# EAGLE board LED MATRIX PTH (EAGLE 9.2.2)
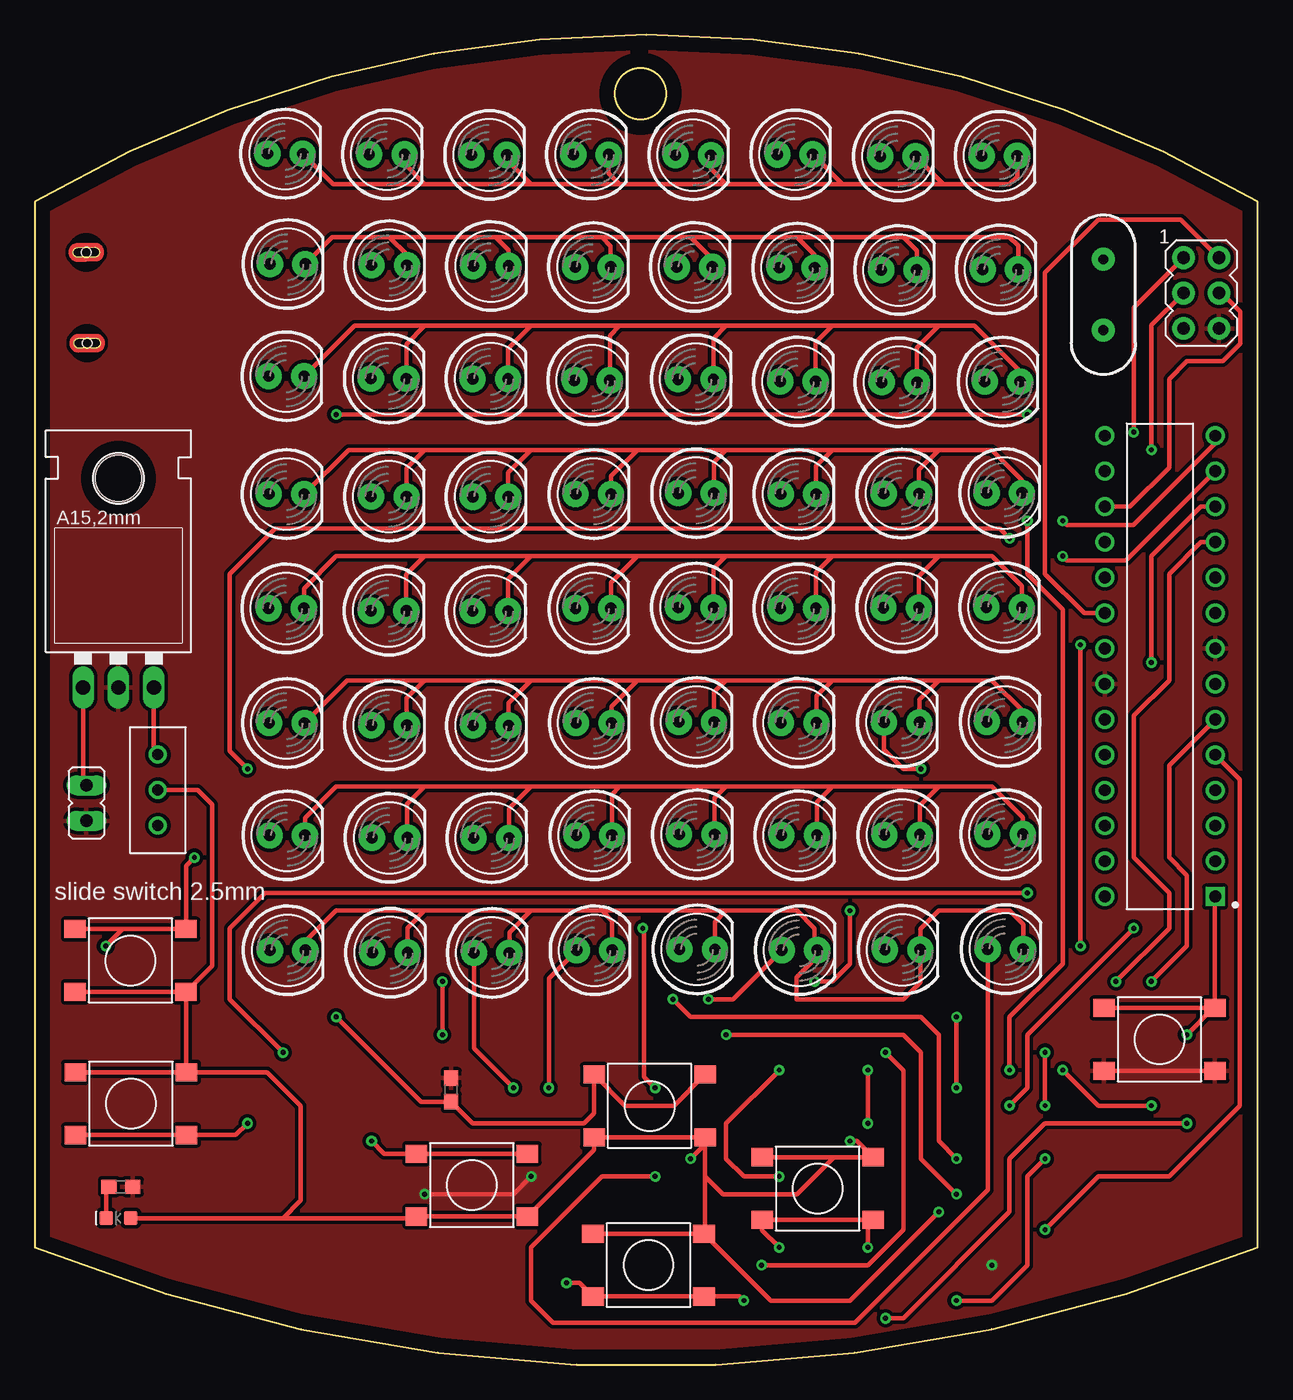
[diagram p0: board, top side]
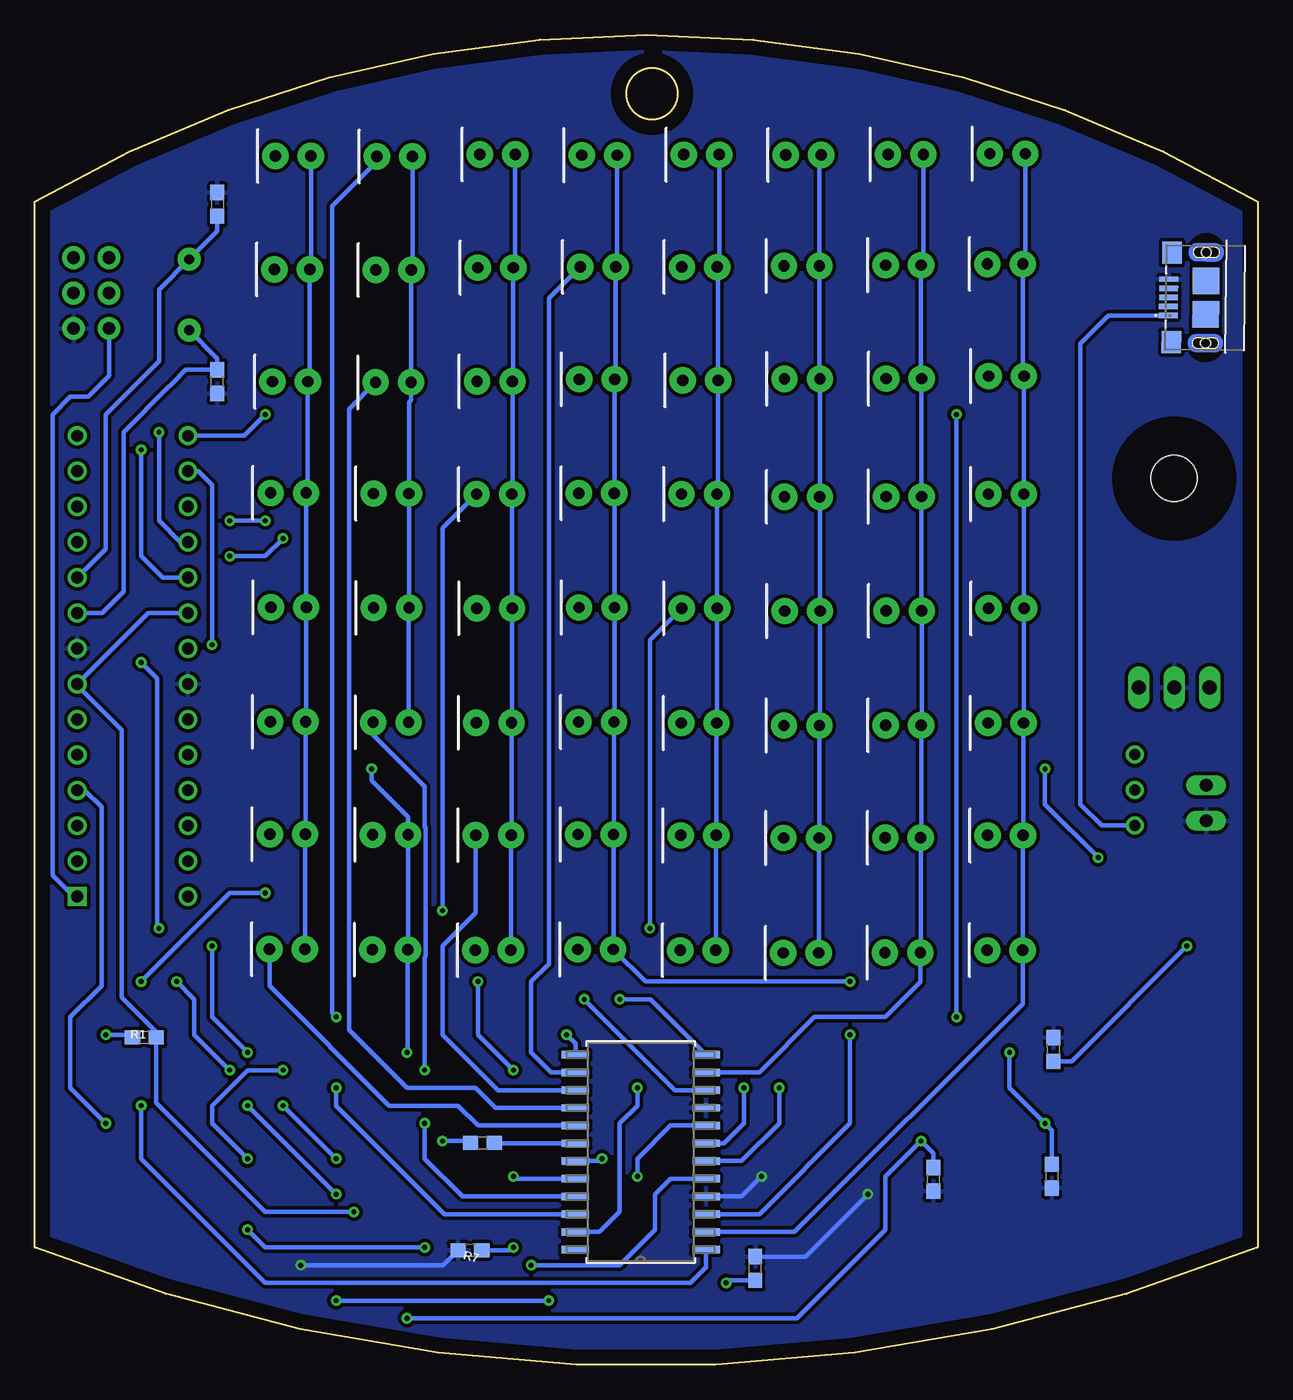
[diagram p1: board, bottom side, seen from below]

Size 87.63 x 95.29 mm. Coordinates in mm from the lower left corner, seen from the top.
Outline: 0,83.33 0,8.4 arc44 87.63,8.4 87.63,83.33 arc61 0,83.33
Outline: circle at 43.4,91.07 radius 1.83
Copper layers (1*16): Top 0.035mm / dielectric 1.5mm / Bottom 0.035mm
Design rules "default": minimum track width 6mil, minimum drill 0.35mm, track to track 6mil, track to pad 6mil, pad to pad 6mil, via to via 6mil, smd to smd 6mil, copper to edge 40mil, drill to drill 6mil, minimum pad ring 10mil, minimum via ring 8mil, stop-mask expansion 4mil, vias tented up to drill 0mil, thermal gap 10mil

## Footprints (pad centres in the part's own frame; a part is rotated, then mirrored left to right if it is on the bottom)
0603 = smd 1.1 x 1: 1 -0.85,0; 2 0.85,0
LED-0603 = smd 1 x 1: A -0.877,0; C 0.877,0
LED_5MM = drill 0.813 pad 1.88: A -1.27,0; K 1.27,0
AVRISP = drill 0.9 pad 1.626: 1 -1.27,2.54; 2 1.27,2.54; 3 -1.27,0; 4 1.27,0; 5 -1.27,-2.54; 6 1.27,-2.54
TE_2013499-1 = smd 0.4 x 1.35: 1 -1.3,0; 2 -0.65,0; 3 0,0; 4 0.65,0; 5 1.3,0 | smd 1.6 x 1.4: 6 3.2,-0.225; 7 -3.2,-0.225 | smd 1.9 x 1.9: 8 -1.2,-2.675; 9 1.2,-2.675 | smd 0.1 x 0.1: 10 -3.76,-2.37; 11 2.75,-2.53 | hole 0.71: -3.255,-2.675; 3.255,-2.675
JP1 = drill 0.914 long: 1 0,-1.27; 2 0,1.27
PTS645SM43SMTR = smd 1.55 x 1.3: 1 -3.975,2.25; 2 3.975,2.25; 3 -3.975,-2.25; 4 3.975,-2.25
78XXL = drill 1.016 long: GND 0,-3.81; IN -2.54,-3.81; OUT 2.54,-3.81 | hole 3.302: 0,11.176
DIP794W46P254L2967H457Q28B = drill 0.85 square: 1 -3.96,16.51 | drill 0.85: 2 -3.96,13.97; 3 -3.96,11.43; 4 -3.96,8.89; 5 -3.96,6.35; 6 -3.96,3.81; 7 -3.96,1.27; 8 -3.96,-1.27; 9 -3.96,-3.81; 10 -3.96,-6.35; 11 -3.96,-8.89; 12 -3.96,-11.43; 13 -3.96,-13.97; 14 -3.96,-16.51; 15 3.96,-16.51; 16 3.96,-13.97; 17 3.96,-11.43; 18 3.96,-8.89; 19 3.96,-6.35; 20 3.96,-3.81; 21 3.96,-1.27; 22 3.96,1.27; 23 3.96,3.81; 24 3.96,6.35; 25 3.96,8.89; 26 3.96,11.43; 27 3.96,13.97; 28 3.96,16.51
21-0042B_24 = smd 1.981 x 0.533: 1 -4.686,6.985; 2 -4.686,5.715; 3 -4.686,4.445; 4 -4.686,3.175; 5 -4.686,1.905; 6 -4.686,0.635; 7 -4.686,-0.635; 8 -4.686,-1.905; 9 -4.686,-3.175; 10 -4.686,-4.445; 11 -4.686,-5.715; 12 -4.686,-6.985; 13 4.686,-6.985; 14 4.686,-5.715; 15 4.686,-4.445; 16 4.686,-3.175; 17 4.686,-1.905; 18 4.686,-0.635; 19 4.686,0.635; 20 4.686,1.905; 21 4.686,3.175; 22 4.686,4.445; 23 4.686,5.715; 24 4.686,6.985
TS02_SWITCH = drill 0.8: PIN1 0,2.54; PIN2 0,0; PIN3 0,-2.54
HC49US = drill 0.7 pad 1.651: 1 -2.54,0; 2 2.54,0

## Placement (x,y rotation side)
C1  22pF  [0603]  74.55,70.44 90 bottom
C2  22pF  [0603]  74.55,83.14 270 bottom
D1  WHITE  [LED-0603]  5.99,10.5 180 top
D2  [LED_5MM]  17.92,86.77 0 top
D3  [LED_5MM]  25.22,86.72 0 top
D4  [LED_5MM]  32.55,86.68 0 top
D5  [LED_5MM]  39.85,86.71 0 top
D6  [LED_5MM]  47.17,86.67 0 top
D7  [LED_5MM]  54.48,86.72 0 top
D8  [LED_5MM]  61.85,86.58 0 top
D9  [LED_5MM]  69.12,86.62 0 top
D10  [LED_5MM]  18.11,78.87 0 top
D11  [LED_5MM]  25.39,78.78 0 top
D12  [LED_5MM]  32.68,78.73 0 top
D13  [LED_5MM]  40,78.65 0 top
D14  [LED_5MM]  47.28,78.66 0 top
D15  [LED_5MM]  54.62,78.61 0 top
D16  [LED_5MM]  61.92,78.44 0 top
D17  [LED_5MM]  69.2,78.48 0 top
D18  [LED_5MM]  18.02,70.83 0 top
D19  [LED_5MM]  25.35,70.66 0 top
D20  [LED_5MM]  32.64,70.64 0 top
D21  [LED_5MM]  39.93,70.53 0 top
D22  [LED_5MM]  47.36,70.61 0 top
D23  [LED_5MM]  54.68,70.45 0 top
D24  [LED_5MM]  61.94,70.4 0 top
D25  [LED_5MM]  69.34,70.44 0 top
D26  [LED_5MM]  18.03,62.38 0 top
D27  [LED_5MM]  25.36,62.21 0 top
D28  [LED_5MM]  32.65,62.19 0 top
D29  [LED_5MM]  40.02,62.38 0 top
D30  [LED_5MM]  47.38,62.45 0 top
D31  [LED_5MM]  54.71,62.39 0 top
D32  [LED_5MM]  62.09,62.42 0 top
D33  [LED_5MM]  69.47,62.46 0 top
D34  [LED_5MM]  18.01,54.19 0 top
D35  [LED_5MM]  25.34,54.02 0 top
D36  [LED_5MM]  32.64,54 0 top
D37  [LED_5MM]  40.01,54.19 0 top
D38  [LED_5MM]  47.36,54.26 0 top
D39  [LED_5MM]  54.7,54.2 0 top
D40  [LED_5MM]  62.08,54.23 0 top
D41  [LED_5MM]  69.45,54.27 0 top
D42  [LED_5MM]  18.05,45.98 0 top
D43  [LED_5MM]  25.38,45.81 0 top
D44  [LED_5MM]  32.68,45.8 0 top
D45  [LED_5MM]  40.05,45.98 0 top
D46  [LED_5MM]  47.4,46.05 0 top
D47  [LED_5MM]  54.74,45.99 0 top
D48  [LED_5MM]  62.12,46.02 0 top
D49  [LED_5MM]  69.49,46.07 0 top
D50  [LED_5MM]  18.09,37.93 0 top
D51  [LED_5MM]  25.42,37.75 0 top
D52  [LED_5MM]  32.71,37.74 0 top
D53  [LED_5MM]  40.08,37.93 0 top
D54  [LED_5MM]  47.44,37.99 0 top
D55  [LED_5MM]  54.77,37.93 0 top
D56  [LED_5MM]  62.15,37.96 0 top
D57  [LED_5MM]  69.53,38.01 0 top
D58  [LED_5MM]  18.11,29.69 0 top
D59  [LED_5MM]  25.44,29.52 0 top
D60  [LED_5MM]  32.73,29.5 0 top
D61  [LED_5MM]  40.11,29.69 0 top
D62  [LED_5MM]  47.46,29.76 0 top
D63  [LED_5MM]  54.8,29.7 0 top
D64  [LED_5MM]  62.18,29.73 0 top
D65  [LED_5MM]  69.55,29.77 0 top
ISP1  AVRISP-6  [AVRISP]  83.59,76.79 0 top
J2  2013499-1  [TE_2013499-1]  6.39,76.48 89.4 bottom
JP1  [JP1]  3.69,40.25 0 top
R1  10k  [0603]  79.78,23.45 0 bottom
R2  330  [0603]  6.16,12.75 180 top
R3  22K  [0603]  55.55,15.89 0 bottom
R4  10K  [0603]  29.84,19.68 90 top
R5  10K  [0603]  36.01,6.89 90 bottom
R6  10K  [0603]  23.25,13.28 270 bottom
R7  10K  [0603]  56.45,8.21 180 bottom
R8  10K  [0603]  14.76,13.5 270 bottom
R9  10K  [0603]  14.64,22.59 90 bottom
S1  PTS645SM43SMTR  [PTS645SM43SMTR]  44.05,18.54 0 top
S9  PTS645SM43SMTR  [PTS645SM43SMTR]  43.97,7.13 180 top
S10  PTS645SM43SMTR  [PTS645SM43SMTR]  31.32,12.86 0 top
S11  PTS645SM43SMTR  [PTS645SM43SMTR]  56.09,12.62 180 top
S12  PTS645SM43SMTR  [PTS645SM43SMTR]  6.89,18.7 180 top
S13  PTS645SM43SMTR  [PTS645SM43SMTR]  6.85,28.96 0 top
S14  PTS645SM43SMTR  [PTS645SM43SMTR]  80.59,23.3 180 top
U1  [78XXL]  5.99,52.33 0 top
U2  ATMEGA328P-PU  [DIP794W46P254L2967H457Q28B]  80.62,50.05 180 top
U3  MAX7219CWGT  [21-0042B_24]  44.21,15.22 180 bottom
U$1  TS02_SWITCH  [TS02_SWITCH]  8.81,41.17 180 top
Y1  16MHz  [HC49US]  76.57,76.66 270 top

## Library data of the parts
C1 C2 = SparkFun-Capacitors; PROD_ID: CAP-07876
D1 = SparkFun-LED; PROD_ID: DIO-09004
D2-D65 = SparkFun-LED
ISP1 = adafruit
J2 = 2013499-1; AVAILABILITY: Unavailable; CENTERLINE_PITCH: .65 mm[.025 in]; COMMENT: 2013499-1; DESCRIPTION: Micro USB REC type B DIP assy_Au_; MF: TE Connectivity; MP: 2013499-1; NUMBER_OF_POSITIONS: 5; PACKAGE: None; PRICE: None; PRODUCT_TYPE: Connector; TE_PURCHASE_URL: https://www.te.com/usa-en/product-2013499-1.html?te_bu=Cor&te_type=disp&te_campaign=seda_glo_cor-seda-global-disp-prtnr-fy19-seda-model-bom-cta_sma-317_1&elqCampaignId=32493
JP1 = jumper
R1 = SparkFun-Resistors; PROD_ID: RES-00824
R2-R9 = SparkFun-Resistors; PROD_ID: RES-07851
S1 S9-S14 = PTS645SM43SMTR; AVAILABILITY: Unavailable; DESCRIPTION: Switch Tact 6mm 100gf h=4.3mm; MF: C&K; MP: PTS645SM43SMTR; PACKAGE: None; PRICE: None
U1 = SparkFun-IC-Power
U2 = ATMEGA328P-PU; AVAILABILITY: Unavailable; DESCRIPTION: Embedded microcontroller ATMEGA328P-PU PDIP 28 Microchip Technology 8-Bit 20 MHz I/O number 23; MF: Microchip; MP: ATMEGA328P-PU; PACKAGE: PDIP-28 Microchip; PRICE: None
U3 = MAX7219CWGT; AVAILABILITY: Unavailable; DESCRIPTION: Ic Drvr Dsply Led 8dig 24soic - Max7219cwg+t; MF: Maxim Integrated; MP: MAX7219CWG+T; PACKAGE: SOIC-24 Maxim Integrated; PRICE: None
U$1 = 2.54mm slide switch
Y1 = SparkFun-Clocks; PROD_ID: XTAL-08181; SF_ID: COM-00536

## Nets
5V: D1.A ISP1.2 R1.2 R3.1 S1.3 S1.4 S9.3 S9.4 S10.3 S10.4 S11.3 S11.4 S12.3 S12.4 S13.3 S13.4 U2.7 U2.20 U3.19 U$1.PIN2
5V_BAT: U1.OUT U$1.PIN3
5V_USB: J2.1 U$1.PIN1
ABC: R8.1 S12.1 S12.2 U2.6
CLK: U2.16 U3.13
COLUMN1: D2.A D10.A D18.A D26.A D34.A D42.A D50.A D58.A U3.2
COLUMN2: D3.A D11.A D19.A D27.A D35.A D43.A D51.A D59.A U3.11
COLUMN3: D4.A D12.A D20.A D28.A D36.A D44.A D52.A D60.A U3.6
COLUMN4: D5.A D13.A D21.A D29.A D37.A D45.A D53.A D61.A U3.7
COLUMN5: D6.A D14.A D22.A D30.A D38.A D46.A D54.A D62.A U3.3
COLUMN6: D7.A D15.A D23.A D31.A D39.A D47.A D55.A D63.A U3.10
COLUMN7: D8.A D16.A D24.A D32.A D40.A D48.A D56.A D64.A U3.5
COLUMN8: D9.A D17.A D25.A D33.A D41.A D49.A D57.A D65.A U3.8
DEF: R9.1 S13.1 S13.2 U2.13
DIN: U2.11 U3.1
DOUT: U3.24
DOWN: R5.1 S9.1 S9.2 U2.14
GND: C1.1 C2.1 ISP1.6 J2.5 JP1.1 R2.1 R4.2 R5.2 R6.2 R7.2 R8.2 R9.2 S14.1 S14.2 U1.GND U2.8 U2.22 U3.4 U3.9
LEFT: R6.1 S10.1 S10.2 U2.4
LOAD: U2.12 U3.12
MISO: ISP1.1 U2.18
MOSI: ISP1.4 U2.17
N$1: C1.2 U2.9 Y1.2
N$2: C2.2 U2.10 Y1.1
N$3: D1.C R2.2
N$9: R3.2 U3.18
RESET: ISP1.5 R1.1 S14.3 S14.4 U2.1
RIGHT: R7.1 S11.1 S11.2 U2.5
ROW1: D2.K D3.K D4.K D5.K D6.K D7.K D8.K D9.K U3.22
ROW2: D10.K D11.K D12.K D13.K D14.K D15.K D16.K D17.K U3.14
ROW3: D18.K D19.K D20.K D21.K D22.K D23.K D24.K D25.K U3.16
ROW4: D26.K D27.K D28.K D29.K D30.K D31.K D32.K D33.K U3.20
ROW5: D34.K D35.K D36.K D37.K D38.K D39.K D40.K D41.K U3.23
ROW6: D42.K D43.K D44.K D45.K D46.K D47.K D48.K D49.K U3.21
ROW7: D50.K D51.K D52.K D53.K D54.K D55.K D56.K D57.K U3.15
ROW8: D58.K D59.K D60.K D61.K D62.K D63.K D64.K D65.K U3.17
SCK: ISP1.3 U2.19
UP: R4.1 S1.1 S1.2 U2.15
V_BAT: JP1.2 U1.IN

## Tracks (layer width: path | path; a pad name or v marks a point on that pad's centre or on a via)
5V  (via drill 0.35)
  Top 0.305: S12.3 S12.4 | S13.3 S13.4 | S9.3 S9.4 | S1.4 S1.3 40.08,15.4 S10.4 S10.3 27.23,10.5 17.78,10.5 | S12.3 10.83,20.98 S13.4 | U$1.PIN2 11.68,41.17 12.7,40.15 12.7,28.58 S13.4 | ISP1.2 82.12,82.06 76.2,82.06 72.39,78.25 72.39,56.66 75.19,53.86 U2.20 | 57.27,14.87 S11.3 58.91,16.02 v58.42,16.02 | 57.27,14.87 S11.4 | 48.03,13.48 S1.4 | 57.27,14.87 54.61,12.21 49.3,12.21 48.03,13.48 | D1.A 17.78,10.5 | v46.99,14.75 48.03,15.79 S1.4 | S9.3 48.03,9.46 48.03,13.48 | 17.78,10.5 19.05,11.77 19.05,18.56 16.66,20.95 S12.3 | S9.3 52.74,4.59 58.42,4.59 v64.77,10.94
  Bottom 0.305: U2.20 79.5,53.86 U2.7 84.58,48.66 81.41,45.48 81.41,26.33 78.93,23.85 R1.2 78.93,18.75 71.12,10.94 v64.77,10.94 | R3.1 56.53,16.02 v58.42,16.02 | U3.19 47.15,14.59 v46.99,14.75
5V_BAT
  Top 0.305: U1.OUT 8.53,43.99 U$1.PIN3
5V_USB
  Bottom 0.305: U$1.PIN1 11.18,38.63 12.7,40.15 12.7,73.17 10.69,75.18 J2.1
ABC  (via drill 0.35)
  Top 0.305: S12.2 S12.1 14.4,16.45 v15.24,17.29 | U2.6 81.28,42.94 81.28,36.34 82.55,35.07 82.55,29.99 v80.01,27.45 | v71.12,33.8 16.51,33.8 13.97,31.26 13.97,26.18 v17.78,22.37
  Bottom 0.305: R8.1 14.76,16.81 v15.24,17.29 17.78,19.83 v17.78,22.37 | v80.01,27.45 73.66,33.8 v71.12,33.8
CLK  (via drill 0.35)
  Top 0.305: v49.53,23.64 62.23,23.64 63.5,22.37 63.5,14.75 v66.04,12.21 | v72.39,18.56 v72.39,22.37 | v74.93,29.99 v74.93,51.58
  Bottom 0.305: U3.13 48.9,23.01 v49.53,23.64 | v66.04,12.21 v72.39,18.56 | v72.39,22.37 74.93,24.91 v74.93,29.99 | v74.93,51.58 74.93,63.01 75.94,64.02 U2.16
COLUMN1
  Bottom 0.305: U3.2 33.18,9.51 16.84,25.85 D58.A 16.82,29.72 D50.A 16.78,37.96 D42.A 16.74,46.02 D34.A 16.76,54.2 D26.A D18.A 16.84,70.92 D10.A 16.65,79.05 D2.A
COLUMN2
  Bottom 0.305: U3.11 35.72,20.94 31.75,24.91 26.67,24.91 24.17,27.41 D59.A 24.15,29.55 D51.A 24.12,37.79 D43.A 24.08,45.85 D35.A 24.09,54.03 D27.A D19.A 24.12,70.7 D11.A 23.95,78.95 D3.A
COLUMN3  (via drill 0.35)
  Top 0.305: v34.29,19.83 31.46,22.66 D60.A
  Bottom 0.305: U3.6 36.99,14.59 34.29,17.29 v34.29,19.83 | D4.A 31.41,86.56 D12.A 31.41,70.68 D20.A D28.A 31.38,54.02 D36.A 31.37,45.84 D44.A 31.41,37.77 D52.A 31.44,29.53 D60.A
COLUMN4  (via drill 0.35)
  Top 0.305: v36.83,19.83 36.83,27.69 D61.A
  Bottom 0.305: U3.7 38.26,15.86 36.83,17.29 v36.83,19.83 | D5.A 38.58,78.79 D13.A 38.66,78.59 D21.A 38.66,62.47 D29.A 38.75,54.2 D37.A 38.74,46.02 D45.A 38.78,37.96 D53.A 38.84,37.9 D61.A
COLUMN5  (via drill 0.35)
  Top 0.305: v29.21,27.45 v29.21,23.64
  Bottom 0.305: v29.21,27.45 43.88,27.45 D62.A 46.17,29.78 D54.A 46.13,38.03 D46.A 46.09,46.09 D38.A 46.11,54.27 D30.A 46.09,62.47 D22.A 46.01,70.69 D14.A 45.9,78.76 D6.A | v29.21,23.64 29.21,17.29 35.72,10.78 U3.3
COLUMN6  (via drill 0.35)
  Top 0.305: v48.26,26.18 50.01,26.18 D63.A
  Bottom 0.305: U3.10 41.75,19.67 v48.26,26.18 | D7.A 53.21,78.75 D15.A 53.35,70.51 D23.A 53.41,62.42 D31.A 53.44,54.21 D39.A 53.43,46.03 D47.A 53.47,37.97 D55.A 53.5,29.72 D63.A
COLUMN7  (via drill 0.35)
  Top 0.305: v60.96,22.37 62.23,21.1 62.23,9.67 59.69,7.13 v52.07,7.13 | v63.5,42.69 62.23,42.69 60.85,44.07 D48.A
  Bottom 0.305: U3.5 42.07,13.32 43.18,12.21 43.18,9.67 45.72,7.13 v52.07,7.13 | v60.96,22.37 60.91,22.42 D64.A 60.91,29.94 60.96,29.99 60.88,30.07 D56.A 60.88,39.23 63.5,41.85 v63.5,42.69 | D8.A 60.58,78.52 D16.A 60.67,78.42 D24.A 60.67,69.13 60.81,68.99 D32.A | D32.A | D48.A 60.85,54.19 D40.A D32.A
COLUMN8  (via drill 0.35)
  Top 0.305: D65.A 68.28,12.52 58.78,3.02 37.13,3.02 35.56,4.59 35.56,8.4 40.64,13.48 v44.45,13.48
  Bottom 0.305: v44.45,13.48 44.45,14.75 42.07,17.13 U3.8 | D9.A 67.85,78.55 D17.A 67.92,70.58 D25.A 68.07,62.59 D33.A 68.2,54.29 D41.A 68.18,46.11 D49.A 68.22,38.04 D57.A 68.26,29.8 D65.A
DEF  (via drill 0.35)
  Top 0.305: S13.1 6.3,31.21 | 6.3,31.21 S13.2 10.83,35.74 v11.43,36.34 | v5.08,29.99 6.3,31.21 | U2.13 78.19,57.63 73.97,57.63 v73.66,57.93 | v69.85,59.2 69.14,59.91 17.22,59.91 13.97,56.66 13.97,43.96 v15.24,42.69
  Bottom 0.305: R9.1 13.34,21.74 v5.08,29.99 | v73.66,57.93 71.12,57.93 v69.85,59.2 | v15.24,42.69 15.24,40.15 v11.43,36.34
DIN  (via drill 0.35)
  Top 0.305: v77.47,27.45 81.28,31.26 81.28,33.8 78.74,36.34 78.74,46.5 81.28,49.04 81.28,56.66 83.56,58.94 U2.11 | v80.01,18.56 76.2,18.56 v73.66,21.1
  Bottom 0.305: U3.1 39.53,6.97 40.64,5.86 71.12,5.86 80.01,14.75 v80.01,18.56 | v73.66,21.1 76.2,23.64 76.2,26.18 v77.47,27.45
DOWN  (via drill 0.35)
  Top 0.305: v38.1,5.86 39.02,5.86 S9.2 S9.1 50.51,4.88 v50.8,4.59 | U2.14 84.58,66.03 78.72,60.17 73.97,60.17 v73.66,60.47 | v71.12,60.47 71.12,56.66 73.66,54.12 73.66,28.72 69.85,24.91 v69.85,21.1 | v66.04,4.59 68.58,4.59 71.12,7.13 71.12,13.48 v72.39,14.75
  Bottom 0.305: v38.1,5.86 37.92,6.04 R5.1 | v50.8,4.59 v66.04,4.59 | v73.66,60.47 v71.12,60.47 | v72.39,14.75 74.93,17.29 74.93,18.56 72.39,21.1 v69.85,21.1
GND  (via drill 0.35)
  Top 0.305: S14.1 S14.2 | v27.94,12.21 34.29,12.21 v35.56,13.48
  Bottom 0.305: R5.2 32.41,7.74 v27.94,12.21 | v35.56,13.48 36.99,12.05 U3.4 | R7.2 58.38,7.13 v68.58,7.13
  pour Top (isolate 0.254): -3.81,96.03 78.74,96.03 96.52,78.25 96.52,7.13 87.63,-1.76 5.08,-1.76 -6.35,9.67 -6.35,93.49
  pour Bottom (isolate 0.254): -7.62,93.49 2.54,103.65 71.12,103.65 97.79,76.98 97.79,54.12 97.79,-8.11 91.44,-14.46 -3.81,-14.46 -11.43,-6.84 -11.43,89.68
LEFT  (via drill 0.35)
  Top 0.305: S10.2 S10.1 25.04,15.11 v24.13,16.02 | v60.96,3.32 62.23,3.32 69.85,10.94 69.85,14.75 72.39,17.29 v82.55,17.29
  Bottom 0.305: R6.1 23.25,15.14 v24.13,16.02 26.67,13.48 26.67,9.67 33.02,3.32 v60.96,3.32 | v82.55,17.29 85.09,19.83 85.09,24.91 82.86,27.15 82.86,39.97 84.04,41.16 U2.4
LOAD  (via drill 0.35)
  Top 0.305: v45.72,26.18 46.99,24.91 63.5,24.91 64.77,23.64 64.77,16.02 v66.04,14.75 | v69.85,18.56 71.12,19.83 71.12,23.64 v78.74,31.26 | U2.12 83.56,61.48 80.01,57.93 v80.01,50.31
  Bottom 0.305: U3.12 43.5,26.18 v45.72,26.18 | v66.04,14.75 v69.85,18.56 | v80.01,50.31 78.87,49.17 78.87,31.39 v78.74,31.26
MISO  (via drill 0.35)
  Top 0.305: ISP1.1 78.74,75.75 v78.74,66.82
  Bottom 0.305: U2.18 77.21,58.94 78.74,60.47 v78.74,66.82
MOSI
  Top 0.305: ISP1.4 85.06,76.79 86.39,75.46 86.39,73.17 85.11,71.9 82.55,71.9 81.28,70.63 81.28,64.28 78.48,61.48 U2.17
N$1
  Bottom 0.305: U2.9 82.81,53.86 81.28,55.39 81.28,66.82 78.11,70 77.84,70.26 76.81,71.29 C1.2 74.55,72.11 Y1.2
N$2
  Bottom 0.305: U2.10 82.55,58.43 82.55,68.09 78.74,71.9 78.74,77.03 Y1.1 74.55,81.22 C2.2
N$3
  Top 0.305: D1.C 5.11,12.54 R2.2
N$9
  Bottom 0.305: R3.2 54.67,15.86 U3.18
RESET  (via drill 0.35)
  Top 0.305: S14.3 S14.4 | S14.3 84.57,33.52 U2.1 | v82.55,23.64 84.46,25.55 S14.3
  Bottom 0.305: ISP1.5 82.32,70.86 83.82,69.36 85.09,69.36 86.36,68.09 86.36,35.07 84.83,33.54 U2.1 | R1.1 80.83,23.64 v82.55,23.64
RIGHT  (via drill 0.35)
  Top 0.305: v53.34,8.4 52.12,9.63 S11.2 59.75,10.37 60.06,10.05 S11.1 59.69,9.99 v59.69,8.4 | U2.5 86.36,41.92 86.36,18.56 81.28,13.48 76.2,13.48 v72.39,9.67
  Bottom 0.305: v53.34,8.4 53.53,8.21 R7.1 | v59.69,8.4 71.12,8.4 v72.39,9.67
ROW1  (via drill 0.35)
  Top 0.305: v66.04,19.83 v66.04,24.91 | D2.K 21.37,84.6 27.94,84.6 | 27.94,84.6 35.56,84.6 | 35.56,84.6 41.91,84.6 | 41.91,84.6 49.53,84.6 | 49.53,84.6 57.87,84.6 | 57.87,84.6 65.09,84.6 | 65.09,84.6 69.85,84.6 70.39,85.14 D9.K | D8.K 65.09,84.6 | D7.K 57.87,84.6 | D6.K 48.44,85.69 49.53,84.6 | D5.K 41.12,85.39 41.91,84.6 | D3.K 26.49,86.05 27.94,84.6 | D4.K 33.82,86.34 35.56,84.6
  Bottom 0.305: U3.22 58.26,10.78 66.04,18.56 v66.04,19.83 | v66.04,24.91 66.34,25.22 66.34,83.03 63.12,86.25 D8.K
ROW2
  Top 0.305: D10.K 21.3,80.79 25.4,80.79 | D17.K 70.47,80.18 69.85,80.79 62.23,80.79 | 25.4,80.79 33.02,80.79 | 33.02,80.79 40.64,80.79 | 40.64,80.79 46.99,80.79 | 46.99,80.79 54.61,80.79 | 54.61,80.79 62.23,80.79 | D16.K 63.19,79.83 62.23,80.79 | D15.K 55.89,79.51 54.61,80.79 | D14.K 48.55,79.23 46.99,80.79 | D13.K 41.27,80.17 40.64,80.79 | D12.K 33.95,79.86 33.02,80.79 | D11.K 26.66,79.53 25.4,80.79
  Bottom 0.305: U3.14 50.64,20.94 52.07,22.37 52.07,27.45 50.8,28.72 50.8,76.41 D14.K
ROW3
  Top 0.305: D18.K 22.9,74.44 27.94,74.44 | D25.K 70.61,71.14 67.31,74.44 64.77,74.44 | 27.94,74.44 35.56,74.44 | 35.56,74.44 41.91,74.44 | 41.91,74.44 49.53,74.44 | 49.53,74.44 57.15,74.44 | 57.15,74.44 64.77,74.44 | D24.K 63.21,72.88 64.77,74.44 | D23.K 55.95,73.24 57.15,74.44 | D22.K 48.63,73.54 49.53,74.44 | D19.K 26.62,73.12 27.94,74.44 | D20.K 33.91,72.79 35.56,74.44 | D21.K 41.2,73.74 41.91,74.44
  Bottom 0.305: U3.16 54.61,18.4 56.04,19.83 60.96,19.83 65.13,24 65.13,68.49 D24.K
ROW4  (via drill 0.35)
  Top 0.305: v55.88,27.45 57.15,27.45 58.42,28.72 v58.42,32.53 | D26.K 22.47,65.55 27.94,65.55 | D33.K 70.74,63.39 68.58,65.55 64.77,65.55 | 27.94,65.55 35.56,65.55 | 35.56,65.55 43.18,65.55 | 43.18,65.55 49.53,65.55 | 49.53,65.55 57.15,65.55 | 57.15,65.55 64.77,65.55 | D32.K 63.37,64.15 64.77,65.55 | D31.K 55.98,64.38 57.15,65.55 | D30.K 48.65,64.67 49.53,65.55 | D29.K 41.29,63.66 43.18,65.55 | D28.K 33.92,63.91 35.56,65.55 | D27.K 26.63,64.24 27.94,65.55 | v53.34,13.48 50.8,13.48 49.53,14.75 49.53,17.29 v53.34,21.1
  Bottom 0.305: U3.20 53.18,13.32 v53.34,13.48 | v53.34,21.1 55.88,23.64 v55.88,27.45 | v58.42,32.53 58.42,59.95 D31.K
ROW5  (via drill 0.35)
  Top 0.305: v44.45,19.83 43.66,20.62 43.66,31.06 43.56,31.16 v43.56,31.26 | D34.K 19.28,55.62 21.59,57.93 27.94,57.93 | 27.94,57.93 35.56,57.93 | 35.56,57.93 43.18,57.93 | 43.18,57.93 49.53,57.93 | 49.53,57.93 57.15,57.93 | 57.15,57.93 64.77,57.93 | 64.77,57.93 68.58,57.93 70.72,55.79 D41.K | D40.K 63.35,56.51 64.77,57.93 | D39.K 55.97,56.75 57.15,57.93 | D38.K 48.63,57.03 49.53,57.93 | D37.K 41.28,56.03 43.18,57.93 | D36.K 33.91,56.28 35.56,57.93 | D35.K 26.62,56.61 27.94,57.93
  Bottom 0.305: U3.23 47.15,9.51 45.72,10.94 45.72,17.29 44.45,18.56 v44.45,19.83 | v43.56,31.26 43.56,51.91 D37.K
ROW6  (via drill 0.35)
  Top 0.305: D42.K 22.38,49.04 27.94,49.04 | D49.K 70.76,46.86 68.58,49.04 64.77,49.04 | 27.94,49.04 35.56,49.04 | 35.56,49.04 43.18,49.04 | 43.18,49.04 49.53,49.04 | 49.53,49.04 57.15,49.04 | 57.15,49.04 64.77,49.04 | D48.K 63.39,47.66 64.77,49.04 | D47.K 56.01,47.9 57.15,49.04 | D46.K 48.67,48.18 49.53,49.04 | D43.K 26.66,47.76 27.94,49.04 | D44.K 33.95,47.43 35.56,49.04 | D45.K 41.32,47.18 43.18,49.04 | v59.69,17.29 v59.69,21.1
  Bottom 0.305: v59.69,21.1 59.69,29.19 59.64,29.24 59.64,38.48 59.69,38.53 59.69,41.42 63.5,45.23 63.5,45.91 D48.K | v59.69,17.29 59.69,14.75 56.99,12.05 U3.21
ROW7
  Top 0.305: D50.K 19.36,39.19 21.59,41.42 27.94,41.42 | 27.94,41.42 35.56,41.42 | 35.56,41.42 41.91,41.42 | 41.91,41.42 49.53,41.42 | 49.53,41.42 57.15,41.42 | 57.15,41.42 64.77,41.42 | 64.77,41.42 68.58,41.42 70.8,39.2 D57.K | D56.K 63.42,40.07 64.77,41.42 | D55.K 56.04,40.31 57.15,41.42 | D54.K 48.71,40.6 49.53,41.42 | D53.K 41.35,40.86 41.91,41.42 | D52.K 33.98,39.84 35.56,41.42 | D51.K 26.69,40.17 27.94,41.42
  Bottom 0.305: U3.15 54.45,19.67 58.42,23.64 58.42,29.99 56.04,32.37 D55.K
ROW8
  Top 0.305: D58.K 19.38,30.32 21.59,32.53 27.94,32.53 | 27.94,32.53 35.56,32.53 | 35.56,32.53 40.64,32.53 | 40.64,32.53 49.53,32.53 | 49.53,32.53 54.61,32.53 55.88,31.26 55.88,29.88 D63.K 56.07,29.27 54.56,27.76 54.56,26.18 62.23,26.18 63.45,27.4 D64.K 63.45,31.21 64.77,32.53 69.85,32.53 70.82,31.56 D65.K | D59.K 26.71,31.3 27.94,32.53 | D60.K 34,30.97 35.56,32.53 | D61.K 41.38,31.79 40.64,32.53 | D62.K 48.73,31.73 49.53,32.53
  Bottom 0.305: U3.17 55.88,17.13 57.31,18.56 62.23,18.56 70.82,27.15 D65.K
SCK  (via drill 0.35)
  Top 0.305: ISP1.3 80.01,74.48 v80.01,65.55
  Bottom 0.305: v80.01,65.55 80.01,57.93 78.48,56.4 U2.19
UP  (via drill 0.35)
  Top 0.305: S1.2 45.8,18.56 42.3,18.56 S1.1 40.08,18 39.37,17.29 31.38,17.29 R4.1 27.66,18.84 v21.59,24.91 | v71.12,68.09 v21.59,68.09
  Bottom 0.305: U2.15 72.65,66.56 v71.12,68.09 | v21.59,24.91 v21.59,68.09
V_BAT
  Top 0.305: U1.IN 3.45,41.76 JP1.2